# EAGLE board avr_lag2 (EAGLE 5.07)
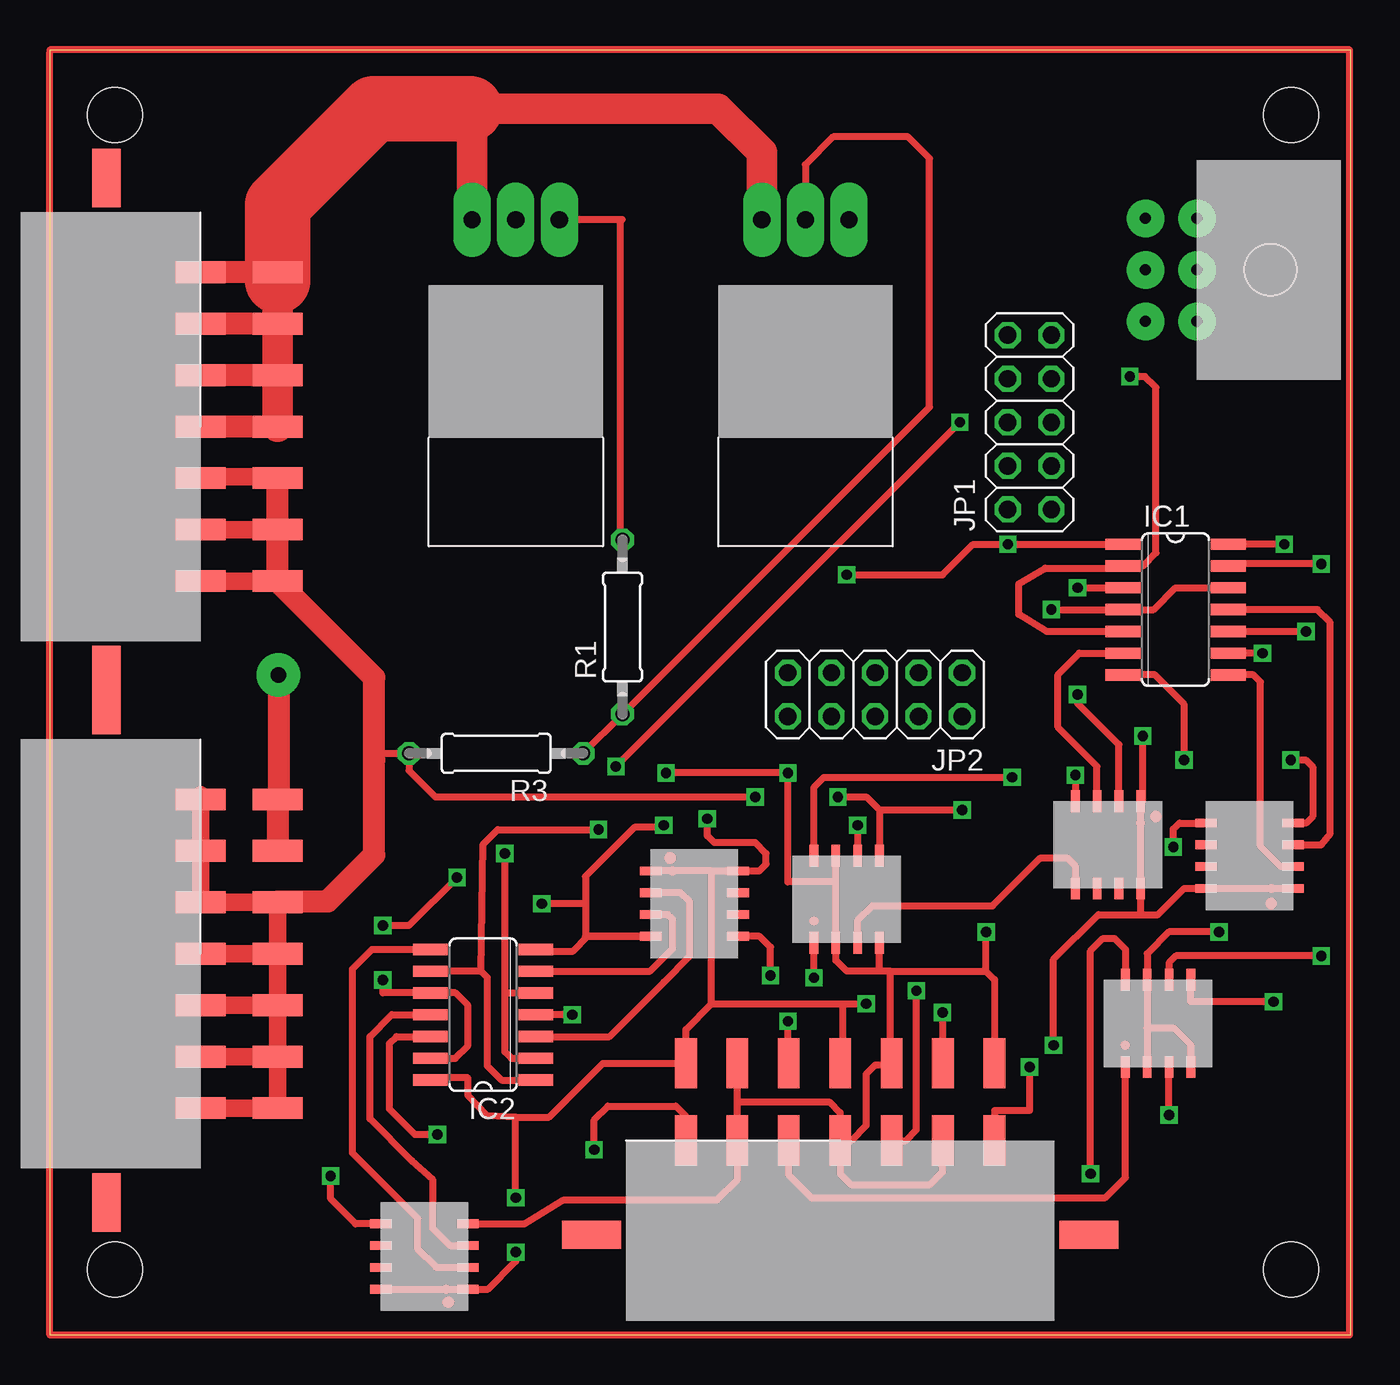
[diagram p0: board, top side]
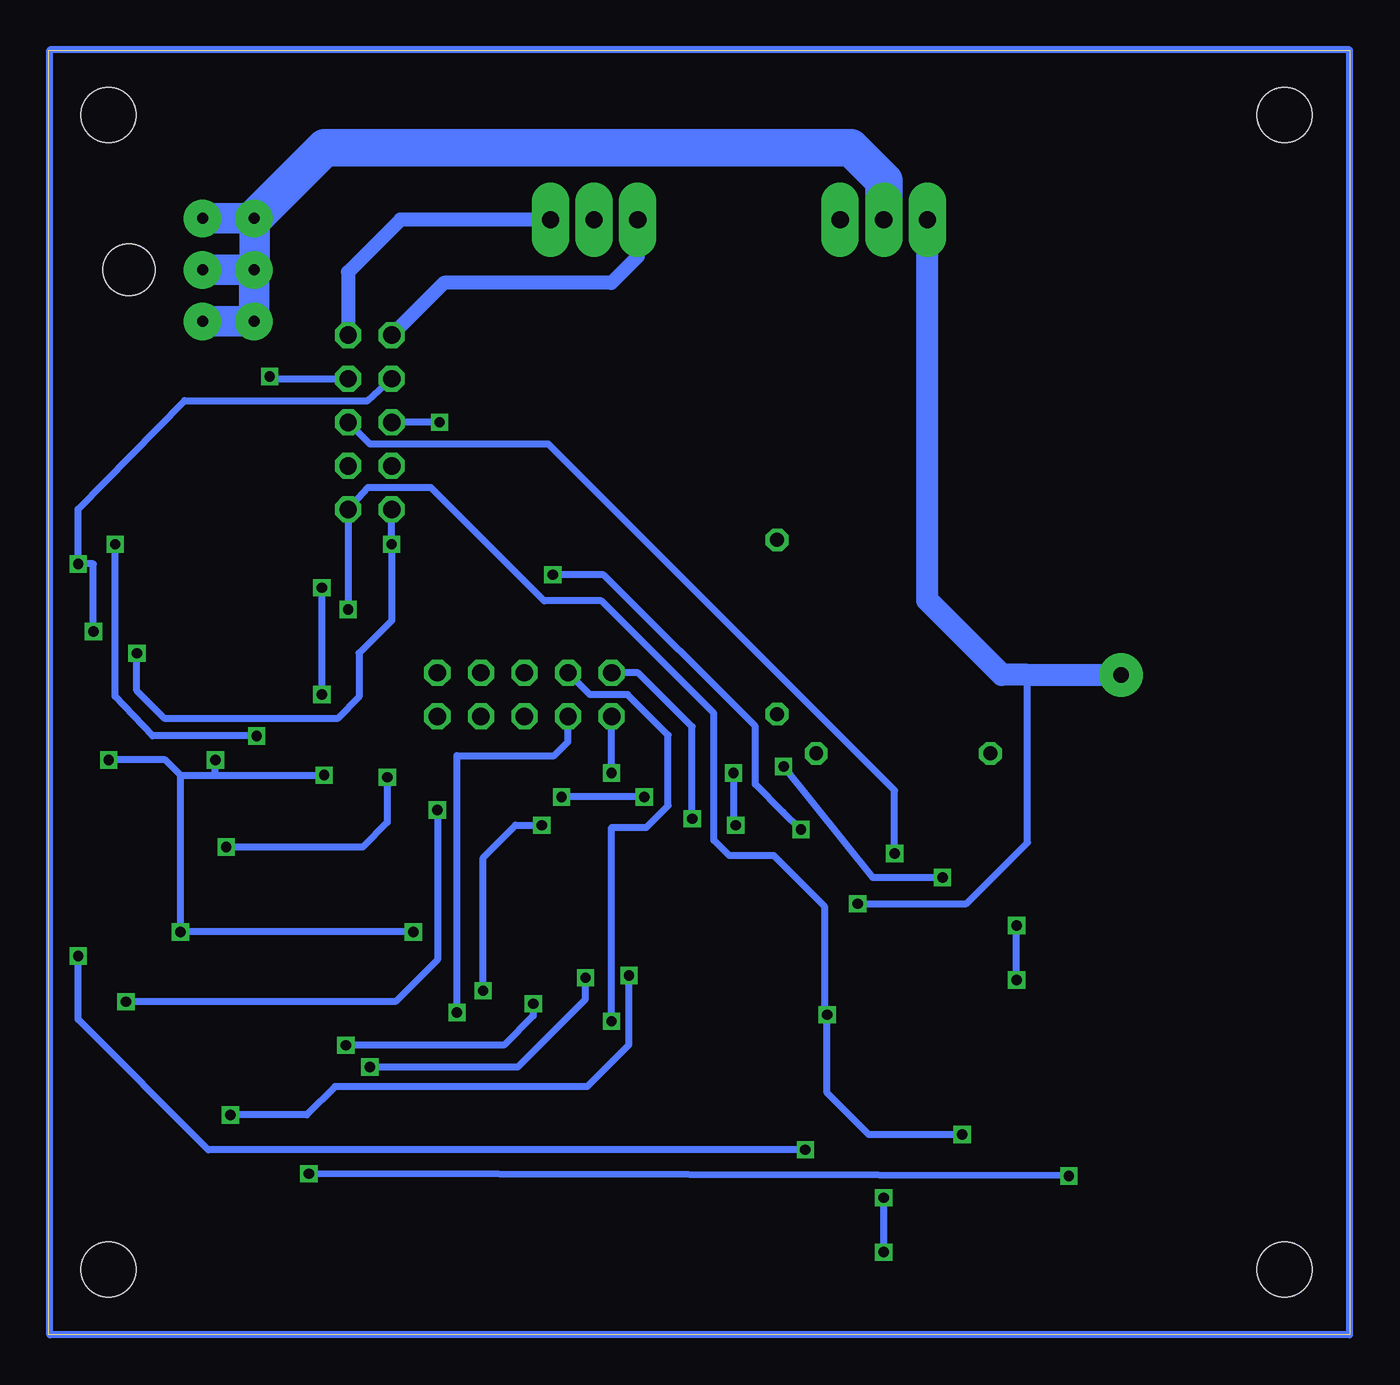
[diagram p1: board, bottom side, seen from below]

Size 75.87 x 74.92 mm. Coordinates in mm from the lower left corner, seen from the top.
Outline: 0,0 75.87,0 75.87,74.92 0,74.92 0,0
Copper layers (1*16): Top 0.035mm / dielectric 1.5mm / Bottom 0.035mm
Design rules "default": minimum track width 10mil, minimum drill 24mil, track to track 8mil, track to pad 8mil, pad to pad 8mil, via to via 8mil, smd to smd 8mil, copper to edge 40mil, drill to drill 8mil, minimum pad ring 10mil, minimum via ring 8mil, stop-mask expansion 4mil, vias tented up to drill 0mil, thermal gap 10mil
Holes 3.2 mm at 3.81,3.81 3.81,71.12 72.39,71.12 72.39,3.81

## Footprints (pad centres in the part's own frame; a part is rotated, then mirrored left to right if it is on the bottom)
SO14 = smd 0.66 x 2.032: 1 -3.81,-3.073; 2 -2.54,-3.073; 3 -1.27,-3.073; 4 0,-3.073; 5 1.27,-3.073; 6 2.54,-3.073; 7 3.81,-3.073; 8 3.81,3.073; 9 2.54,3.073; 10 1.27,3.073; 11 0,3.073; 12 -1.27,3.073; 13 -2.54,3.073; 14 -3.81,3.073
2X05 = drill 1.016 octagon: 1 -5.08,-1.27; 2 -5.08,1.27; 3 -2.54,-1.27; 4 -2.54,1.27; 5 0,-1.27; 6 0,1.27; 7 2.54,-1.27; 8 2.54,1.27; 9 5.08,-1.27; 10 5.08,1.27
0207/10 = drill 0.813 octagon: 1 -5.08,0; 2 5.08,0
IRFZ46N = drill 1 pad 2.184 long: DRAIN_PAD 0,0; GATE_PAD -2.54,0; SOURCE_PAD 2.54,0
MICROFIT14SOCK = smd 3.43 x 1.65: P$15 -14.5,-7.5; P$16 14.5,-7.5 | smd 1.27 x 2.92: PIN1 9,-2; PIN2 6,-2; PIN3 3,-2; PIN4 0,-2; PIN5 -3,-2; PIN6 -6,-2; PIN7 -9,-2; PIN8 9,2.5; PIN9 6,2.5; PIN10 3,2.5; PIN11 0,2.5; PIN12 -3,2.5; PIN13 -6,2.5; PIN14 -9,2.5
MICROFIT6SOCK = drill 0.64 pad 2.184 round: PIN1 3,-1.5; PIN2 3,1.5; PIN3 0,-1.5; PIN4 0,1.5; PIN5 -3,-1.5; PIN6 -3,1.5 | hole 3: 0,-5.8
SOIC8 = smd 0.508 x 1.27: PIN1 -1.27,-2.54; PIN2 0,-2.54; PIN3 1.27,-2.54; PIN4 2.54,-2.54; PIN5 -1.27,2.54; PIN6 0,2.54; PIN7 1.27,2.54; PIN8 2.54,2.54

## Placement (x,y rotation side)
IC1  74HC08D  [SO14]  65.66,42.29 270 top
IC2  74HC08D  [SO14]  25.27,18.67 90 top
JP1  [2X05]  57.15,53.21 90 top
JP2  [2X05]  48.13,37.34 180 top
R1  [0207/10]  33.4,41.27 90 top
R3  [0207/10]  26.04,33.91 180 top
U$1  IRFZ46N  [IRFZ46N]  44.07,65.02 180 top
U$2  IRFZ46N  [IRFZ46N]  27.18,65.02 180 top
U$3  MICROFIT14  [MICROFIT14SOCK]  10.79,52.96 270 top
U$4  MICROFIT14  [MICROFIT14SOCK]  10.79,22.23 270 top
U$5  MICROFIT6  [MICROFIT6SOCK]  65.41,62.1 90 top
U$6  TC1320EOA  [SOIC8]  37.59,25.78 270 top
U$7  TC1320EOA  [SOIC8]  62.36,28.57 180 top
U$8  TC1320EOA  [SOIC8]  69.98,27.3 90 top
U$9  TL072  [SOIC8]  45.85,25.4 0 top
U$10  TC1320EOA  [SOIC8]  21.84,3.94 90 top
U$11  TL072  [SOIC8]  64.01,18.16 0 top
U$12  MICROFIT14  [MICROFIT14SOCK]  46.1,13.34 0 top

## Library data of the parts
IC1 IC2 = 74xx-eu
JP1 JP2 = pinhead
R1 R3 = resistor
U$1-U$12 = unicorn

## Nets
+12V: R3.2 U$3.PIN1 U$3.PIN2 U$3.PIN3 U$3.PIN8 U$3.PIN9 U$3.PIN10 U$4.PIN1 U$4.PIN2 U$4.PIN3 U$4.PIN4 U$4.PIN5 U$4.PIN6 U$4.PIN7 U$4.PIN8 U$4.PIN9 U$4.PIN10 U$4.PIN11 U$4.PIN12 U$9.PIN8 U$11.PIN8
ADC0_PF0: JP2.1
ADC1_PF1: JP2.2
ADC2_PF2: JP2.3
ADC3_PF3: JP2.4
ADC4_PF4: JP2.5
ADC5_PF5: JP2.6
ADC6_PF6: JP2.7 U$12.PIN12
ADC7_PF7: JP2.8 U$12.PIN9
GND: IC1.7 IC2.7 JP1.10 JP2.10 U$1.SOURCE_PAD U$2.SOURCE_PAD U$3.PIN4 U$3.PIN5 U$3.PIN6 U$3.PIN7 U$3.PIN11 U$3.PIN12 U$3.PIN13 U$3.PIN14 U$4.PIN13 U$4.PIN14 U$6.PIN4 U$7.PIN4 U$8.PIN4 U$9.PIN2 U$9.PIN4 U$9.PIN6 U$10.PIN4 U$11.PIN2 U$11.PIN4 U$11.PIN6 U$12.PIN2 U$12.PIN4 U$12.PIN6 U$12.PIN8 U$12.PIN10 U$12.PIN13
MOTOR_GND: U$2.DRAIN_PAD U$5.PIN1 U$5.PIN2 U$5.PIN3 U$5.PIN4 U$5.PIN5 U$5.PIN6
N$1: R1.1 R3.1 U$1.DRAIN_PAD
N$2: R1.2 U$2.GATE_PAD
N$5: U$7.PIN8 U$9.PIN3
N$6: U$8.PIN8 U$9.PIN5
N$9: IC1.11 U$8.PIN3
N$12: IC1.8 U$8.PIN2
N$13: IC1.6 U$7.PIN3
N$14: IC1.3 U$7.PIN2
N$15: U$6.PIN8 U$11.PIN3
N$16: U$10.PIN8 U$11.PIN5
N$17: IC2.11 U$10.PIN3
N$18: IC2.8 U$10.PIN2
N$19: IC2.6 U$6.PIN3
N$20: IC2.3 U$6.PIN2
PB2_MOSI: JP1.4
PB3: IC2.2 IC2.5 JP1.5
PB4: IC2.10 IC2.13 JP1.6
PB5: IC1.2 IC1.5 JP1.7
PB6: IC1.10 IC1.13 JP1.8
PWM: JP1.9 U$1.GATE_PAD
SCK: JP1.3
SCL: IC1.4 IC1.12 IC2.4 IC2.12 JP1.1
SDA: IC1.1 IC1.9 IC2.1 IC2.9 JP1.2
VCC: IC1.14 IC2.14 JP2.9 U$6.PIN1 U$6.PIN5 U$7.PIN1 U$7.PIN5 U$8.PIN1 U$8.PIN5 U$10.PIN1 U$10.PIN5 U$12.PIN11 U$12.PIN14
VOUT_CLUTCH1: U$11.PIN1 U$12.PIN5
VOUT_CLUTCH2: U$11.PIN7 U$12.PIN7
VOUT_GEAR1: U$9.PIN1 U$12.PIN1
VOUT_GEAR2: U$9.PIN7 U$12.PIN3

## Tracks (layer width: path | path; a pad name or v marks a point on that pad's centre or on a via)
+12V  (via drill 0.6)
  Top 0.406: U$3.PIN3 8.76,49.96 8.76,50.04 | U$3.PIN10 13.29,50.04 | U$4.PIN10 13.46,19.23 13.46,18.67 13.29,18.67 | U$4.PIN1 9.02,13.22 9.02,13.21 | 13.29,13.21 U$4.PIN8 | U$4.PIN7 8.76,31.23 8.76,31.5 8.79,31.5 | U$4.PIN12 13.29,25.27 | U$11.PIN8 66.55,19.43 v71.37,19.43 | 48.39,30.61 v53.21,30.61 | 48.39,30.61 U$9.PIN8 | 18.92,33.53 18.92,33.91 R3.2 20.95,32.9 22.48,31.37 v41.15,31.37 | v45.97,31.37 47.62,31.37 48.39,30.61 | U$4.PIN11 13.72,22.23 13.72,21.97 U$4.PIN11
  Top 1.016: U$3.PIN9 U$3.PIN2 | 13.29,50.04 8.76,50.04 | U$3.PIN8 U$3.PIN1 | U$4.PIN11 U$4.PIN4 | U$4.PIN3 U$4.PIN10 U$4.PIN11 | U$4.PIN9 U$4.PIN2 | 9.02,13.21 13.29,13.21 | 8.79,31.5 U$4.PIN6 U$4.PIN5 U$4.PIN12 U$4.PIN11 | U$4.PIN9 13.29,18.67 | U$4.PIN8 U$4.PIN9
  Top 1.27: U$3.PIN10 U$3.PIN9 U$3.PIN8 18.92,38.33 18.92,33.53 18.92,27.99 16.2,25.27 13.29,25.27
  Bottom 0.406: v53.21,30.61 53.21,21.87 55.65,19.43 v71.37,19.43 | v41.15,31.37 v45.97,31.37
ADC6_PF6  (via drill 0.6)
  Top 0.406: U$12.PIN12 43.05,15.84 v43.05,18.29
  Bottom 0.406: v43.05,18.29 43.05,29.59 41.02,29.59 39.75,30.86 39.75,34.98 42.11,37.34 44.32,37.34 JP2.7
ADC7_PF7  (via drill 0.6)
  Top 0.406: v52.07,18.8 52.1,18.8 U$12.PIN9
  Bottom 0.406: JP2.8 45.59,34.59 46.4,33.78 52.07,33.78 v52.07,18.8
GND  (via drill 0.6, 0.9 pad 2.54)
  Top 0.406: U$3.PIN4 9.14,52.96 | 24.64,71.5 24.51,71.5 | 13.34,31.23 U$4.PIN14 | v68.2,23.5 65.28,23.5 64.01,22.23 U$11.PIN6 64.01,17.91 | 64.01,17.91 U$11.PIN2 | 64.01,17.91 65.56,17.91 66.55,16.91 U$11.PIN4 | 54.61,21.21 v54.61,23.5 | 49.02,21.21 54.61,21.21 | 49.02,21.21 48.39,21.21 | 48.39,21.21 U$9.PIN4 | 54.61,21.21 55.1,20.72 U$12.PIN8 | U$10.PIN4 27.69,6.48 29.97,7.87 38.93,7.87 40.1,9.05 U$12.PIN6 40.1,13.59 | U$12.PIN4 46.75,11.34 47.62,12.21 47.62,15.22 48.15,15.75 49.1,15.75 U$12.PIN10 49.02,15.84 49.02,21.21 | U$12.PIN2 52.07,11.34 52.07,9.5 51.33,8.76 46.74,8.76 46.1,9.4 U$12.PIN4 | 40.1,13.59 U$12.PIN13 | IC2.7 28.35,22.35 30.48,22.35 31.37,23.24 U$6.PIN4 31.24,23.24 31.24,25.15 | 45.85,26.42 U$9.PIN2 45.85,21.84 46.48,21.21 48.39,21.21 | 45.85,26.42 U$9.PIN6 | 45.85,26.42 43.05,26.42 v43.05,32.77 v35.94,32.77 | 40.1,13.59 45.47,13.59 46.1,12.95 U$12.PIN4 | 31.24,25.15 31.24,26.74 34.1,29.59 35.81,29.59 v35.81,29.72 | 31.24,25.15 v28.7,25.15 | v72.39,33.53 73.26,33.53 73.66,33.13 73.66,30.23 73.28,29.84 U$8.PIN4 | v59.82,32.64 U$7.PIN4 | v66.17,33.53 66.17,36.77 64.46,38.48 IC1.7
  Top 1.27: U$3.PIN14 U$3.PIN7 | U$3.PIN13 U$3.PIN6 | U$3.PIN12 U$3.PIN5 | U$3.PIN11 U$3.PIN4 | U$4.PIN14 U$4.PIN13 | v13.34,38.48 13.34,31.23
  Top 1.778: U$3.PIN14 13.29,61.47 U$3.PIN13 U$3.PIN12 U$3.PIN11 | U$2.SOURCE_PAD 24.64,71.5 38.97,71.5 41.53,68.94 U$1.SOURCE_PAD
  Top 3.81: 24.51,71.5 18.89,71.5 13.29,65.9 13.29,61.47
  Bottom 0.406: 24.64,42.83 24.64,42.67 | v54.61,23.5 v68.2,23.5 68.2,32.64 | v43.05,32.77 JP2.10 | v35.81,29.72 35.94,29.72 v35.94,32.77 | v28.7,25.15 22.35,25.15 18.8,28.7 18.8,38.48 | 68.2,32.64 69.09,33.53 v72.39,33.53 | 68.2,32.64 66.17,32.64 | 66.17,32.64 v59.82,32.64 | 66.17,32.64 v66.17,33.53
  Bottom 0.813: U$1.SOURCE_PAD 41.53,62.87 43.06,61.34 52.83,61.34 JP1.10
  Bottom 1.27: v13.34,38.48 18.8,38.48 20.29,38.48 24.64,42.83 U$2.SOURCE_PAD
MOTOR_GND
  Bottom 0.406: U$5.PIN4 63.91,62.36 63.88,62.36 | U$5.PIN2 63.88,65.1
  Bottom 1.778: U$5.PIN5 U$5.PIN6 U$5.PIN4 U$5.PIN3 | 63.88,65.1 63.88,62.36 | U$5.PIN2 U$5.PIN1
  Bottom 2.184: U$2.DRAIN_PAD 27.18,67.31 29.08,69.22 59.79,69.22 U$5.PIN2
N$1
  Top 0.406: U$1.DRAIN_PAD 44.07,68.23 45.69,69.85 50.06,69.85 51.31,68.6 51.31,54.1 R1.1 R3.1
N$2
  Top 0.406: 29.84,64.9 29.84,65.02 U$2.GATE_PAD 33.27,65.02 | 33.27,65.02 33.4,65.02 | R1.2 33.27,46.35 33.27,65.02
N$5
  Top 0.406: U$7.PIN8 59.82,27.36 59.36,27.81 57.78,27.81 54.99,25.02 47.97,25.02 47.12,24.17 U$9.PIN3
N$6  (via drill 0.6)
  Top 0.406: v65.53,28.45 65.53,29.49 65.89,29.84 U$8.PIN8 | U$9.PIN5 44.58,31.94 45.15,32.51 v56.13,32.51
  Bottom 0.406: v56.13,32.51 56.13,29.89 57.57,28.45 v65.53,28.45
N$9
  Top 0.406: U$8.PIN3 74.16,28.57 74.68,29.22 74.68,41.55 73.94,42.29 IC1.11
N$10
  Bottom 0.406: 0,74.93 75.82,74.93 75.82,0 0,0 0,74.93
N$11
  Top 0.406: 0,74.93 75.82,74.93 75.82,0 0,0 0,74.8
N$12
  Top 0.406: U$8.PIN2 71.81,27.3 70.61,28.5 70.61,38.08 70.21,38.48 IC1.8
N$13
  Top 0.406: IC1.6 60.05,39.75 58.8,38.5 58.8,35.43 61.09,33.15 U$7.PIN3
N$14  (via drill 0.6)
  Top 0.406: v59.94,43.56 IC1.3 | v59.94,37.34 59.94,36.83 62.36,34.42 U$7.PIN2
  Bottom 0.406: v59.94,37.34 v59.94,43.56
N$15  (via drill 0.6)
  Top 0.406: v65.28,12.83 U$11.PIN3 | v42.04,20.95 42.04,22.61 41.4,23.24 U$6.PIN8
  Bottom 0.406: v65.28,12.83 60.83,12.83 59.18,14.48 44.48,14.48 42.04,16.92 v42.04,20.95
N$16  (via drill 0.6)
  Top 0.406: U$10.PIN8 17.83,6.48 16.38,7.92 v16.38,9.27 | v60.71,9.4 60.71,22.4 61.42,23.11 62.1,23.11 62.74,22.48 U$11.PIN5
  Bottom 0.406: v16.38,9.27 v60.71,9.4
N$17
  Top 0.406: U$10.PIN3 23.34,5.21 22.35,6.2 22.35,9.05 21.11,10.16 18.67,12.6 18.67,17.4 19.94,18.67 IC2.11
N$18
  Top 0.406: IC2.8 18.79,22.48 17.65,21.34 17.65,10.6 19.36,8.89 21.46,6.79 21.46,5.03 22.55,3.94 U$10.PIN2
N$19
  Top 0.406: IC2.6 35.01,21.21 36.32,22.52 36.32,24.23 36.04,24.51 U$6.PIN3
N$20
  Top 0.406: U$6.PIN2 36.8,25.78 37.34,25.24 37.34,22.1 35.81,20.57 32.64,17.4 IC2.3
PB3  (via drill 0.6)
  Top 0.406: IC2.2 26.92,16.13 26.54,16.51 26.54,19.94 | 26.54,19.94 IC2.5 | 26.54,19.94 v26.54,28.07
  Bottom 0.406: v26.54,28.07 26.54,31.75 46.74,51.94 57.15,51.94 JP1.5
PB4  (via drill 0.6)
  Top 0.406: IC2.13 23.64,16.13 24.38,16.87 24.38,19.22 23.67,19.94 IC2.10 19.43,19.94 v19.43,20.7 | v33.02,33.15 v53.09,53.21 | v19.43,23.88 20.95,23.88 v23.75,26.67
  Bottom 0.406: v19.43,20.7 v19.43,23.88 | v53.09,53.21 JP1.6 | v23.75,26.67 27.81,26.67 v33.02,33.15
PB5  (via drill 0.6)
  Top 0.406: v62.99,55.88 63.88,55.88 64.52,55.24 64.52,45.6 63.74,44.83 IC1.2 62.61,44.83 62.61,44.7 58.07,44.7 56.52,43.79 56.52,42.01 58.14,41.02 IC1.5
  Bottom 0.406: JP1.7 62.99,55.75 v62.99,55.88
PB6  (via drill 0.6)
  Top 0.406: v74.17,44.96 68.73,44.96 IC1.13 | IC1.10 v73.28,41.02
  Bottom 0.406: JP1.8 57.28,54.48 67.96,54.48 74.17,48.14 v74.17,44.96 73.28,44.96 v73.28,41.02
PWM
  Bottom 0.813: U$1.GATE_PAD 55.37,65.02 58.42,61.97 JP1.9
SCL  (via drill 0.6)
  Top 0.406: IC1.12 65.66,43.56 64.39,42.29 IC1.4 v58.42,42.29 | IC2.12 20.21,17.4 19.81,17 19.81,13.16 21.29,11.68 v22.61,11.68 | v30.48,18.67 IC2.4
  Bottom 0.406: v58.42,42.29 JP1.1 57.28,49.4 53.59,49.4 46.99,42.8 43.64,42.8 37.08,36.24 37.08,28.84 36.19,27.94 33.58,27.94 30.61,24.96 30.61,18.67 v30.48,18.67 30.48,14.11 28.05,11.68 v22.61,11.68
SDA  (via drill 0.6)
  Top 0.406: IC1.1 v55.88,46.1 53.85,46.1 52.07,44.32 v46.48,44.32 | v70.74,39.75 IC1.9 | 25.15,21.21 IC2.9 | IC2.1 26.34,14.86 25.53,15.67 25.53,20.83 25.15,21.21 | 25.15,21.21 25.27,28.61 26.12,29.46 v32,29.46
  Bottom 0.406: JP1.2 v55.88,46.1 55.88,41.66 57.78,39.75 57.78,37.2 59.04,35.94 69.11,35.94 70.74,37.57 v70.74,39.75 | v32,29.46 33.05,30.48 34.67,32.11 34.67,35.48 43.52,44.32 v46.48,44.32
VCC  (via drill 0.6)
  Top 0.406: U$10.PIN5 U$10.PIN1 25.55,2.67 27.18,4.29 v27.18,4.83 | v72.01,46.1 IC1.14 | v63.75,34.92 63.75,31.11 U$7.PIN1 U$7.PIN5 63.63,24.51 | 63.63,24.51 64.64,24.51 66.17,26.04 U$8.PIN5 U$8.PIN1 | 38.61,27.05 U$6.PIN1 | 38.61,27.05 U$6.PIN5 41.38,27.05 41.78,27.45 41.78,28.07 41.15,28.7 38.76,28.7 38.35,29.1 v38.35,30.1 | U$12.PIN11 46.23,15.84 46.23,19.3 | 38.61,19.3 46.23,19.3 | 27.18,12.7 29.12,12.7 32.25,15.84 U$12.PIN14 37.1,17.8 38.61,19.3 | 27.18,12.7 25.5,12.78 24.38,13.95 24.38,14.99 22.2,14.99 IC2.14 | v27.18,8 27.18,12.7 | 38.61,19.3 38.61,27.05 | v58.55,16.89 58.55,21.89 61.16,24.51 63.63,24.51 | 46.23,19.3 v47.62,19.3
  Bottom 0.406: v63.75,34.92 69.82,34.92 72.01,37.24 v72.01,46.1 | v27.18,4.83 v27.18,8 | v38.35,30.1 38.35,35.46 41.5,38.61 JP2.9 | v47.62,19.3 47.62,18.6 49.33,16.89 v58.55,16.89
VOUT_CLUTCH1
  Top 0.406: U$11.PIN1 62.74,9.17 61.57,8 44.42,8 43.1,9.32 U$12.PIN5
VOUT_CLUTCH2  (via drill 0.6)
  Top 0.406: U$12.PIN7 37.08,11.34 37.08,12.77 36.52,13.34 32.55,13.34 31.75,12.53 v31.75,10.79 | v74.17,22.1 65.68,22.1 65.28,21.7 U$11.PIN7
  Bottom 0.406: v31.75,10.79 66.57,10.79 74.17,18.39 v74.17,22.1
VOUT_GEAR1  (via drill 0.6)
  Top 0.406: v44.58,20.83 U$9.PIN1 | v57.15,15.62 57.15,13.08 55.1,13.08 U$12.PIN1
  Bottom 0.406: v44.58,20.83 44.58,19.57 48.53,15.62 v57.15,15.62
VOUT_GEAR2  (via drill 0.6)
  Top 0.406: U$12.PIN3 49.93,11.34 50.55,11.95 v50.55,20.07 | v47.12,29.72 U$9.PIN7
  Bottom 0.406: v50.55,20.07 50.55,27.83 48.66,29.72 v47.12,29.72
(copper drawn outside any net)
  shapes: Bottom circle x4, Top circle x8

## Text on the board
Top: UNICORN NODE4